# EAGLE board Rev B (EAGLE 6.4)
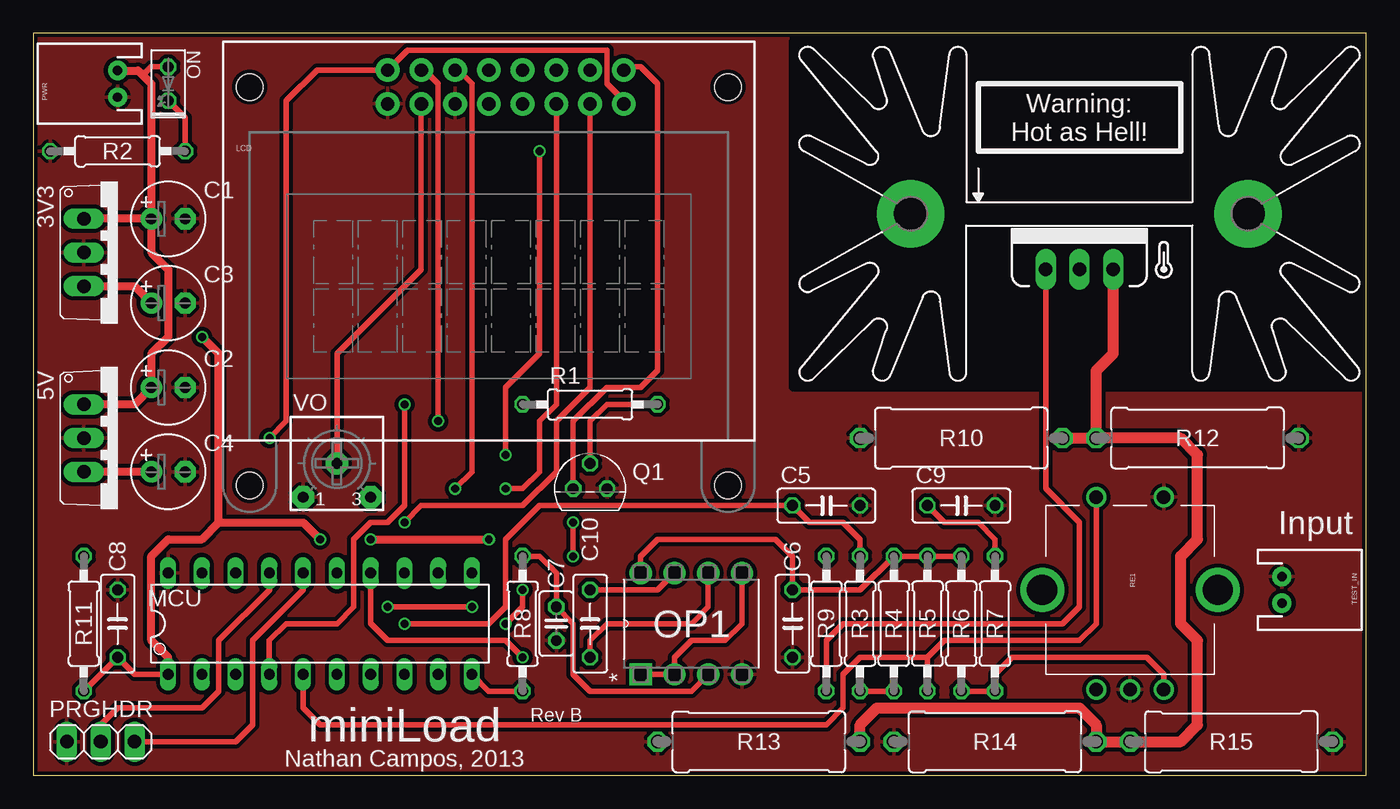
[diagram p0: board, top side]
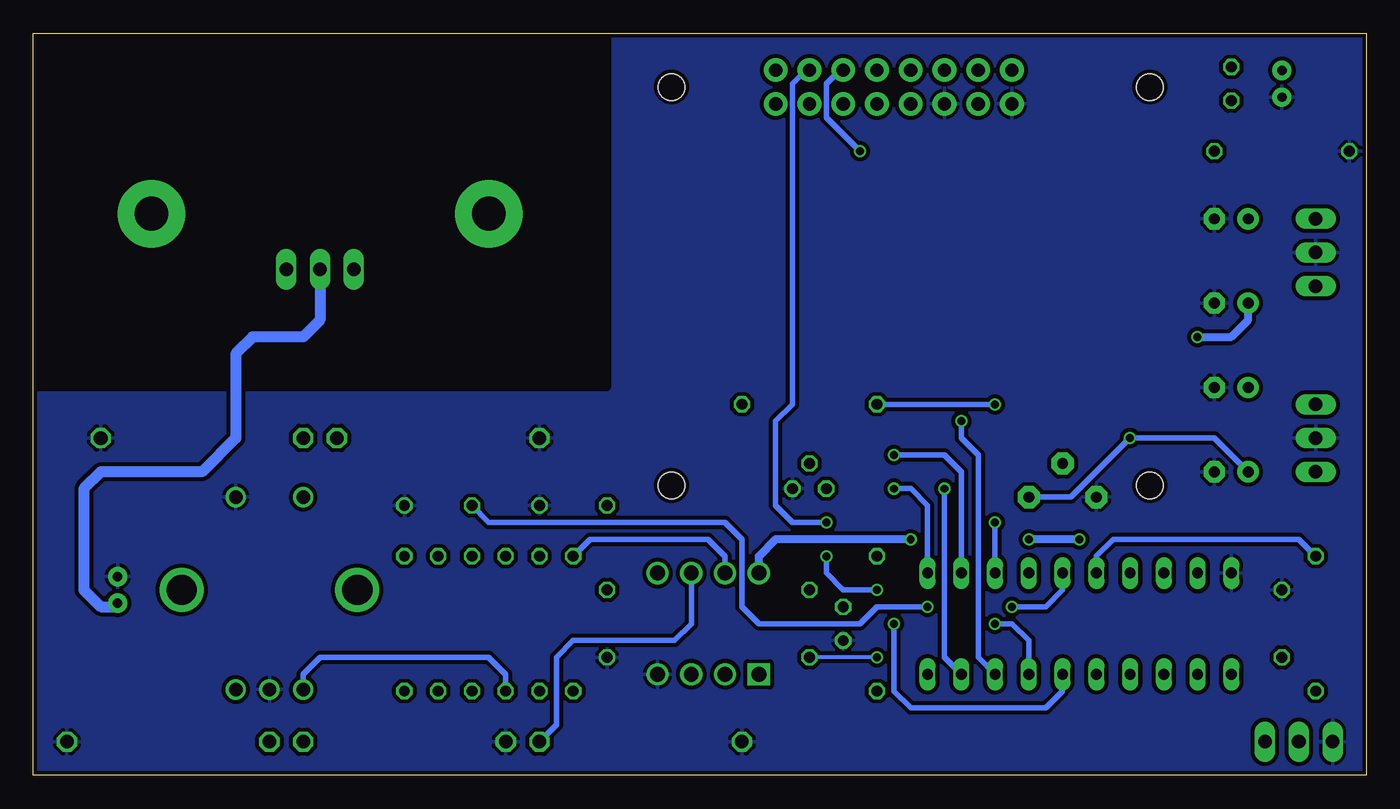
[diagram p1: board, bottom side, seen from below]

Size 100.33 x 55.88 mm. Coordinates in mm from the lower left corner, seen from the top.
Outline: 0,0 100.33,0 100.33,55.88 0,55.88 0,0
Copper layers (1*2*15*16): Top 0.035mm / dielectric 0.2mm / Route2 0.0175mm / dielectric 1.1mm / Route15 0.0175mm / dielectric 0.2mm / Bottom 0.035mm
Design rules "SeeedStudio_DRU_no_angle_20130527": minimum track width 6mil, minimum drill 12mil, track to track 6mil, track to pad 6mil, pad to pad 6mil, via to via 6mil, smd to smd 0mil, copper to edge 10mil, drill to drill 10mil, minimum pad ring 6mil, minimum via ring 6mil, stop-mask expansion 2mil, vias tented up to drill 25mil, thermal gap 10mil
tRestrict: area 69.8,29.2 to 87.6,41.9
bRestrict: area 57.1,29.2 to 100.3,55.9

## Footprints (pad centres in the part's own frame; a part is rotated, then mirrored left to right if it is on the bottom)
TO220V = drill 1.016 long: 1 -2.54,-2.54; 2 0,-2.54; 3 2.54,-2.54
E2,5-6 = drill 0.813 pad 1.6: + -1.27,0 | drill 0.813 pad 1.6 octagon: - 1.27,0
C050-025X075 = drill 0.813 octagon: 1 -2.54,0; 2 2.54,0
C025-025X050 = drill 0.813 octagon: 1 -1.27,0; 2 1.27,0
SK129 = drill 2.54 pad 5.08: A2,5 -12.7,-0.889; B2,5 12.7,-0.889
LCD-8X2 = drill 1 pad 1.778: 1 -7.62,13.73; 2 -7.62,16.27; 3 -5.08,13.73; 4 -5.08,16.27; 5 -2.54,13.73; 6 -2.54,16.27; 7 0,13.73; 8 0,16.27; 9 2.54,13.73; 10 2.54,16.27; 11 5.08,13.73; 12 5.08,16.27; 13 7.62,13.73; 14 7.62,16.27; 15 10.16,13.73; 16 10.16,16.27 | hole 2: 18,15; -18,15; -18,-15; 18,-15
N20 = drill 0.813 long: 1 -11.435,-3.81; 2 -8.895,-3.81; 3 -6.355,-3.81; 4 -3.815,-3.81; 5 -1.275,-3.81; 6 1.265,-3.81; 7 3.805,-3.81; 8 6.345,-3.81; 9 8.885,-3.81; 10 11.425,-3.81; 11 11.425,3.81; 12 8.885,3.81; 13 6.345,3.81; 14 3.805,3.81; 15 1.265,3.81; 16 -1.275,3.81; 17 -3.815,3.81; 18 -6.355,3.81; 19 -8.895,3.81; 20 -11.435,3.81
TO220V' = drill 1.016 long: 1 -2.54,0; 2 0,0; 3 2.54,0
LED2X5 = drill 0.813 octagon: A -1.27,0; K 1.27,0
DIP254P762X508-8 = drill 1.118 square: 1 -7.62,7.62 | drill 1.118: 2 -7.62,5.08; 3 -7.62,2.54; 4 -7.62,0; 5 0,0; 6 0,2.54; 7 0,5.08; 8 0,7.62
1X03 = drill 1.016 long: 1 -2.54,0; 2 0,0; 3 2.54,0
JST-2-PTH = drill 0.7 pad 1.448: 1 -1,0; 2 1,0
TO92 = drill 0.813 octagon: 1 1.27,0; 2 0,1.905; 3 -1.27,0
0207/10 = drill 0.813 octagon: 1 -5.08,0; 2 5.08,0
P0613/15 = drill 1.016 octagon: 1 -7.62,0; 2 7.62,0
ROTARY_ENC_PLAIN = drill 1.016: A 7.493,-2.54; B 7.493,2.54; C 7.493,0; SW+ -6.985,2.54; SW- -6.985,-2.54 | drill 2.286: P$3 0,6.604; P$4 0,-6.604
3362H = drill 0.813 pad 1.676 octagon: 1 -2.54,-3.175; 2 0,-0.635; 3 2.54,-3.175

## Placement (x,y rotation side)
3V3  7805TV  [TO220V]  6.35,39.37 270 top
5V  7805TV  [TO220V]  6.35,25.4 270 top
C1  2.2uF  [E2,5-6]  10.16,41.91 0 top
C2  2.2uF  [E2,5-6]  10.16,29.21 0 top
C3  47uF  [E2,5-6]  10.16,35.56 0 top
C4  22uF  [E2,5-6]  10.16,22.86 0 top
C5  10nF  [C050-025X075]  59.69,20.32 0 top
C6  0.1uF  [C050-025X075]  57.15,11.43 90 top
C7  1uF  [C025-025X050]  39.37,11.43 270 top
C8  0.1uF  [C050-025X075]  6.35,11.43 270 top
C9  10nF  [C050-025X075]  69.85,20.32 0 top
C10  10nF  [C050-025X075]  41.91,11.43 270 top
HEATSINK  SK129-PAD  [SK129]  78.74,43.18 0 top
LCD  LCD-16X28X2  [LCD-8X2]  34.29,36.83 0 top
MCU  G2XX3---N20  [N20]  21.59,11.43 0 top
N-CHANNEL  MOSFET-NCHANNELFQP30N06L  [TO220V']  78.74,38.1 0 top
ON  [LED2X5]  10.16,52.07 270 top
OP1  TLV2372IP  [DIP254P762X508-8]  53.34,15.24 90 top
PRGHDR  [1X03]  5.08,2.54 0 top
PWR  M02JST-PTH-2  [JST-2-PTH]  6.35,52.07 90 top
Q1  BC547  [TO92]  41.91,21.59 0 top
R1  10kΩ  [0207/10]  41.91,27.94 0 top
R2  1kΩ  [0207/10]  6.35,46.99 0 top
R3  10kΩ  [0207/10]  62.23,11.43 270 top
R4  10kΩ  [0207/10]  64.77,11.43 90 top
R5  10kΩ  [0207/10]  67.31,11.43 90 top
R6  10kΩ  [0207/10]  69.85,11.43 90 top
R7  10kΩ  [0207/10]  72.39,11.43 90 top
R8  100kΩ  [0207/10]  36.83,11.43 270 top
R9  1kΩ  [0207/10]  59.69,11.43 270 top
R10  5Ω  [P0613/15]  69.85,25.4 0 top
R11  10kΩ  [0207/10]  3.81,11.43 270 top
R12  5Ω  [P0613/15]  87.63,25.4 180 top
R13  5Ω  [P0613/15]  54.61,2.54 0 top
R14  5Ω  [P0613/15]  72.39,2.54 0 top
R15  5Ω  [P0613/15]  90.17,2.54 180 top
RE1  ROTARTY_ENCODER  [ROTARY_ENC_PLAIN]  82.55,13.97 270 top
TEST_IN  M02JST-PTH-2  [JST-2-PTH]  93.98,13.97 270 top
U$1  [ICON_TEMP]  85.09,38.1 0 top
VO  10kΩ  [3362H]  22.86,24.13 0 top

## Library data of the parts
3V3 5V = linear
C1-C10 R10 R12-R15 = rcl
HEATSINK = heatsink
LCD = SparkFun-Displays
MCU = TI_MSP430_v16
N-CHANNEL = SparkFun-DiscreteSemi; PROD_ID: TRANS-10060
ON = led
OP1 = Texas Instruments_By_element14_Batch_1; MPN: TLV2372IP; OC_FARNELL: 8455031; OC_NEWARK: 76C7976; PACKAGE: PDIP; SUPPLIER: Texas Instruments
PRGHDR = pinhead
PWR TEST_IN = SparkFun-Connectors
Q1 = transistor-npn
R1-R9 R11 = resistor
RE1 = SparkFun-Electromechanical
U$1 = dicons
VO = bourns

## Nets
+5V: 5V.3 C4.+ LCD.2 LCD.15 VO.3
BKL_CTRL: MCU.4 R1.1
CURR_SENSE: C10.2 MCU.14 N-CHANNEL.3 OP1.6 R10.2 R12.2 R13.2 R14.2 R15.2
CURR_SET: OP1.1 OP1.2 OP1.5
DB4: LCD.11 MCU.11
DB5: LCD.12 MCU.12
DB6: LCD.13 MCU.13
DB7: LCD.14 MCU.6
GND: 3V3.2 5V.2 C1.- C2.- C3.- C4.- C5.2 C6.1 C7.2 C8.1 C9.2 LCD.1 LCD.5 MCU.20 OP1.4 PRGHDR.1 PWR.1 Q1.1 R2.1 R10.1 R12.1 R13.1 R14.1 R15.1 RE1.C RE1.SW+ TEST_IN.1 VO.1
LCD_EN: LCD.6 MCU.9
N$3: N-CHANNEL.1 R9.2
N$4: C10.1 OP1.7 R9.1
N$6: ON.K R2.2
N$8: MCU.10 R8.2
N$9: LCD.16 Q1.3
N$10: LCD.3 VO.2
N$16: Q1.2 R1.2
PWM_FILTERED: C7.1 OP1.3 R8.1
RE_A: C5.1 MCU.7 R3.1
RE_A_: R3.2 R4.1 RE1.A
RE_B: C9.1 MCU.15 R7.2
RE_B_: R6.1 R7.1 RE1.B
RE_BTN: MCU.5 R5.1 RE1.SW-
RS: LCD.4 MCU.8
RST: MCU.16 PRGHDR.3 R11.1
TEST: MCU.17 PRGHDR.2
TVIN: N-CHANNEL.2 TEST_IN.2
VCC: 3V3.3 C3.+ C6.2 C8.2 MCU.1 OP1.8 R4.2 R5.2 R6.2 R11.2
VIN: 3V3.1 5V.1 C1.+ C2.+ ON.A PWR.2

## Tracks (layer width: path | path; a pad name or v marks a point on that pad's centre or on a via)
+5V  (via drill 0.6)
  Top 0.406: LCD.15 44.45,50.8 43.18,52.07 43.18,54.61 28.18,54.61 LCD.2 21.35,53.1 19.05,50.8 19.05,26.67 v17.78,25.4
  Top 0.61: C4.+ 5V.3
  Bottom 0.406: VO.3 22.23,20.95 v17.78,25.4 11.43,25.4 C4.+
BKL_CTRL  (via drill 0.6)
  Top 0.406: MCU.4 17.77,10.15 19.05,11.43 22.86,11.43 24.13,12.7 24.13,17.78 25.4,19.05 26.67,19.05 27.94,20.32 v27.94,27.94
  Bottom 0.406: v27.94,27.94 R1.1
CURR_SENSE  (via drill 0.6)
  Top 0.406: C10.2 41.91,10.16 43.18,11.43 49.53,11.43 50.8,12.7 OP1.6 | MCU.14 25.39,11.44 26.67,10.16 35.56,10.16 v36.83,8.89
  Top 0.813: R10.2 R12.2 | R12.2 80.01,30.48 81.28,31.75 N-CHANNEL.3 | R12.2 86.36,25.4 87.63,24.13 87.63,17.78 86.36,16.51 86.36,11.43 87.63,10.16 87.63,3.81 86.36,2.54 R15.2 R14.2 80.01,3.81 78.74,5.08 63.5,5.08 62.23,3.81 R13.2
  Bottom 0.305: v36.83,8.89 C10.2
  Bottom 0.406: OP1.6 50.8,11.43 52.07,10.16 59.69,10.16 60.96,8.89 60.96,3.81 R13.2
CURR_SET
  Top 0.406: OP1.1 OP1.2 48.26,8.89 49.53,10.16 52.07,10.16 53.34,11.43 OP1.5
DB4  (via drill 0.6)
  Top 0.406: LCD.11 39.37,27.94 38.1,26.67 38.1,22.86 36.83,21.59 v35.56,21.59
  Bottom 0.406: v35.56,21.59 34.29,21.59 33.02,20.32 MCU.11
DB5  (via drill 0.6)
  Top 0.406: v38.1,46.99 38.1,31.75 35.56,29.21 v35.56,24.13
  Bottom 0.406: LCD.12 39.61,53.1 40.64,52.07 40.64,49.53 v38.1,46.99 | v35.56,24.13 31.75,24.13 30.48,22.86 MCU.12
DB6  (via drill 0.6)
  Top 0.406: LCD.13 41.91,29.21 39.37,26.67 39.37,22.86 36.83,20.32 29.21,20.32 v27.94,19.05
  Bottom 0.406: v27.94,19.05 MCU.13
DB7  (via drill 0.6)
  Top 0.406: v36.83,13.97 36.83,12.7 v35.56,11.43 | v40.64,19.05 v40.64,16.51
  Bottom 0.406: LCD.14 42.15,53.1 43.18,52.07 43.18,27.94 44.45,26.67 44.45,20.32 43.18,19.05 v40.64,19.05 | MCU.6 22.86,6.35 24.13,5.08 34.29,5.08 35.56,6.35 v35.56,11.43 | v40.64,16.51 40.64,15.24 39.37,13.97 v36.83,13.97
GND
  pour Bottom (isolate 0.305): 0,55.88 100.33,55.88 100.33,0 0,0
  pour Top (isolate 0.305): 0,55.88 100.33,55.88 100.33,0 0,0
LCD_EN  (via drill 0.6)
  Top 0.406: LCD.6 31.99,53.1 33.02,52.07 33.02,22.86 v31.75,21.59
  Bottom 0.406: v31.75,21.59 31.75,8.89 MCU.9
N$3
  Top 0.406: R9.2 59.69,10.16 60.96,11.43 77.47,11.43 78.74,12.7 78.74,19.05 76.2,21.59 N-CHANNEL.1
N$4
  Top 0.406: C10.1 46.99,13.97 OP1.7
  Bottom 0.406: R9.1 58.42,17.78 49.53,17.78 48.26,16.51 OP1.7
N$6
  Top 0.406: ON.K 11.43,49.53 R2.2
N$8
  Top 0.406: MCU.10 34.29,6.35 R8.2
N$9
  Top 0.406: Q1.3 40.64,26.67 43.18,29.21 45.72,29.21 46.99,30.48 46.99,52.07 45.72,53.34 44.69,53.34 LCD.16
N$10
  Top 0.406: VO.2 22.86,31.75 29.21,38.1 LCD.3
N$16
  Top 0.406: R1.2 43.18,27.94 41.91,26.67 Q1.2
PWM_FILTERED
  Top 0.406: OP1.3 49.53,6.35 41.91,6.35 40.64,7.62 40.64,11.43 C7.1 39.37,15.24 38.1,16.51 R8.1
RE_A  (via drill 0.6)
  Top 0.406: R3.1 62.23,17.78 60.96,19.05 58.42,19.05 C5.1 38.1,20.32 35.56,17.78 35.56,12.7 34.29,11.43 v27.94,11.43
  Bottom 0.406: MCU.7 25.39,10.15 26.67,11.43 v27.94,11.43
RE_A_
  Top 0.406: R3.2 R4.1
  Bottom 0.406: RE1.A 80.01,7.62 78.74,8.89 66.04,8.89 64.77,7.62 R4.1
RE_B  (via drill 0.6)
  Top 0.406: R7.2 72.39,17.78 71.12,19.05 68.58,19.05 C9.1 | v26.67,12.7 v33.02,12.7
  Bottom 0.406: MCU.15 22.86,13.97 24.13,12.7 v26.67,12.7 | v33.02,12.7 36.83,12.7 38.1,11.43 45.72,11.43 46.99,12.7 46.99,17.78 48.26,19.05 66.04,19.05 C9.1
RE_B_
  Top 0.406: RE1.B 85.09,7.62 83.82,8.89 73.66,8.89 72.39,7.62 R7.1 R6.1
RE_BTN
  Top 0.406: R5.1 67.31,8.89 | 67.31,8.89 68.58,10.16 78.74,10.16 80.01,11.43 RE1.SW- | 67.31,8.89 62.23,8.89 60.96,7.62 60.96,5.08 59.69,3.81 21.59,3.81 20.32,5.08 MCU.5
RS  (via drill 0.6)
  Top 0.406: LCD.4 29.45,53.1 30.48,52.07 v30.48,26.67
  Bottom 0.406: v30.48,26.67 30.48,25.4 29.21,24.13 29.21,8.89 MCU.8
RST
  Top 0.406: PRGHDR.3 15.24,2.54 16.51,3.81 16.51,10.16 20.32,13.97 MCU.16
  Bottom 0.406: MCU.16 20.32,16.52 19.05,17.78 5.08,17.78 R11.1
TEST
  Top 0.406: PRGHDR.2 5.08,3.81 6.35,5.08 12.7,5.08 13.97,6.35 13.97,10.16 17.78,13.97 MCU.17
TVIN
  Bottom 0.813: N-CHANNEL.2 78.74,34.29 80.01,33.02 83.82,33.02 85.09,31.75 85.09,25.4 87.63,22.86 95.25,22.86 96.52,21.59 96.52,13.97 95.25,12.7 94.25,12.7 TEST_IN.2
VCC  (via drill 0.6)
  Top 0.406: OP1.8 45.72,16.51 46.99,17.78 55.88,17.78 57.15,16.51 C6.2 62.23,13.97 R4.2 R5.2 R6.2 | R11.2 C8.2 7.62,7.62 MCU.1
  Top 0.61: 3V3.3 7.62,36.83 C3.+ | MCU.1 10.15,8.89 8.89,10.16 8.89,16.51 10.16,17.78 12.7,17.78 13.97,19.05 | 13.97,19.05 13.97,31.75 v12.7,33.02 | 13.97,19.05 20.32,19.05 v21.59,17.78 | v25.4,17.78 v34.29,17.78
  Bottom 0.61: v12.7,33.02 10.16,33.02 8.89,34.29 C3.+ | v21.59,17.78 v25.4,17.78 | OP1.8 45.72,16.51 44.45,17.78 v34.29,17.78
VIN
  Top 0.406: ON.A 8.89,53.34 8.26,52.7
  Top 0.61: PWR.2 7.89,53.07 8.26,52.7 8.89,52.07 C1.+ | C1.+ 3V3.1 | C1.+ 8.89,39.37 10.16,38.1 10.16,33.02 8.89,31.75 C2.+ 7.62,27.94 5V.1

## Text on the board
tPlace: Warning: / Hot as Hell! | Input | Rev B | miniLoad | Nathan Campos, 2013